# Altium PCB NRF51822 PCB.PcbDoc
Units mil, origin at the board's own origin, x right, y up, seen from the top; angles counter-clockwise.
Board outline 3525 x 2710 mil, 2 copper layers (Top Layer, Bottom Layer); 9 components, 8 nets, 69 pads, 2 vias.
Unrouted connection lines stored in the file: 1.
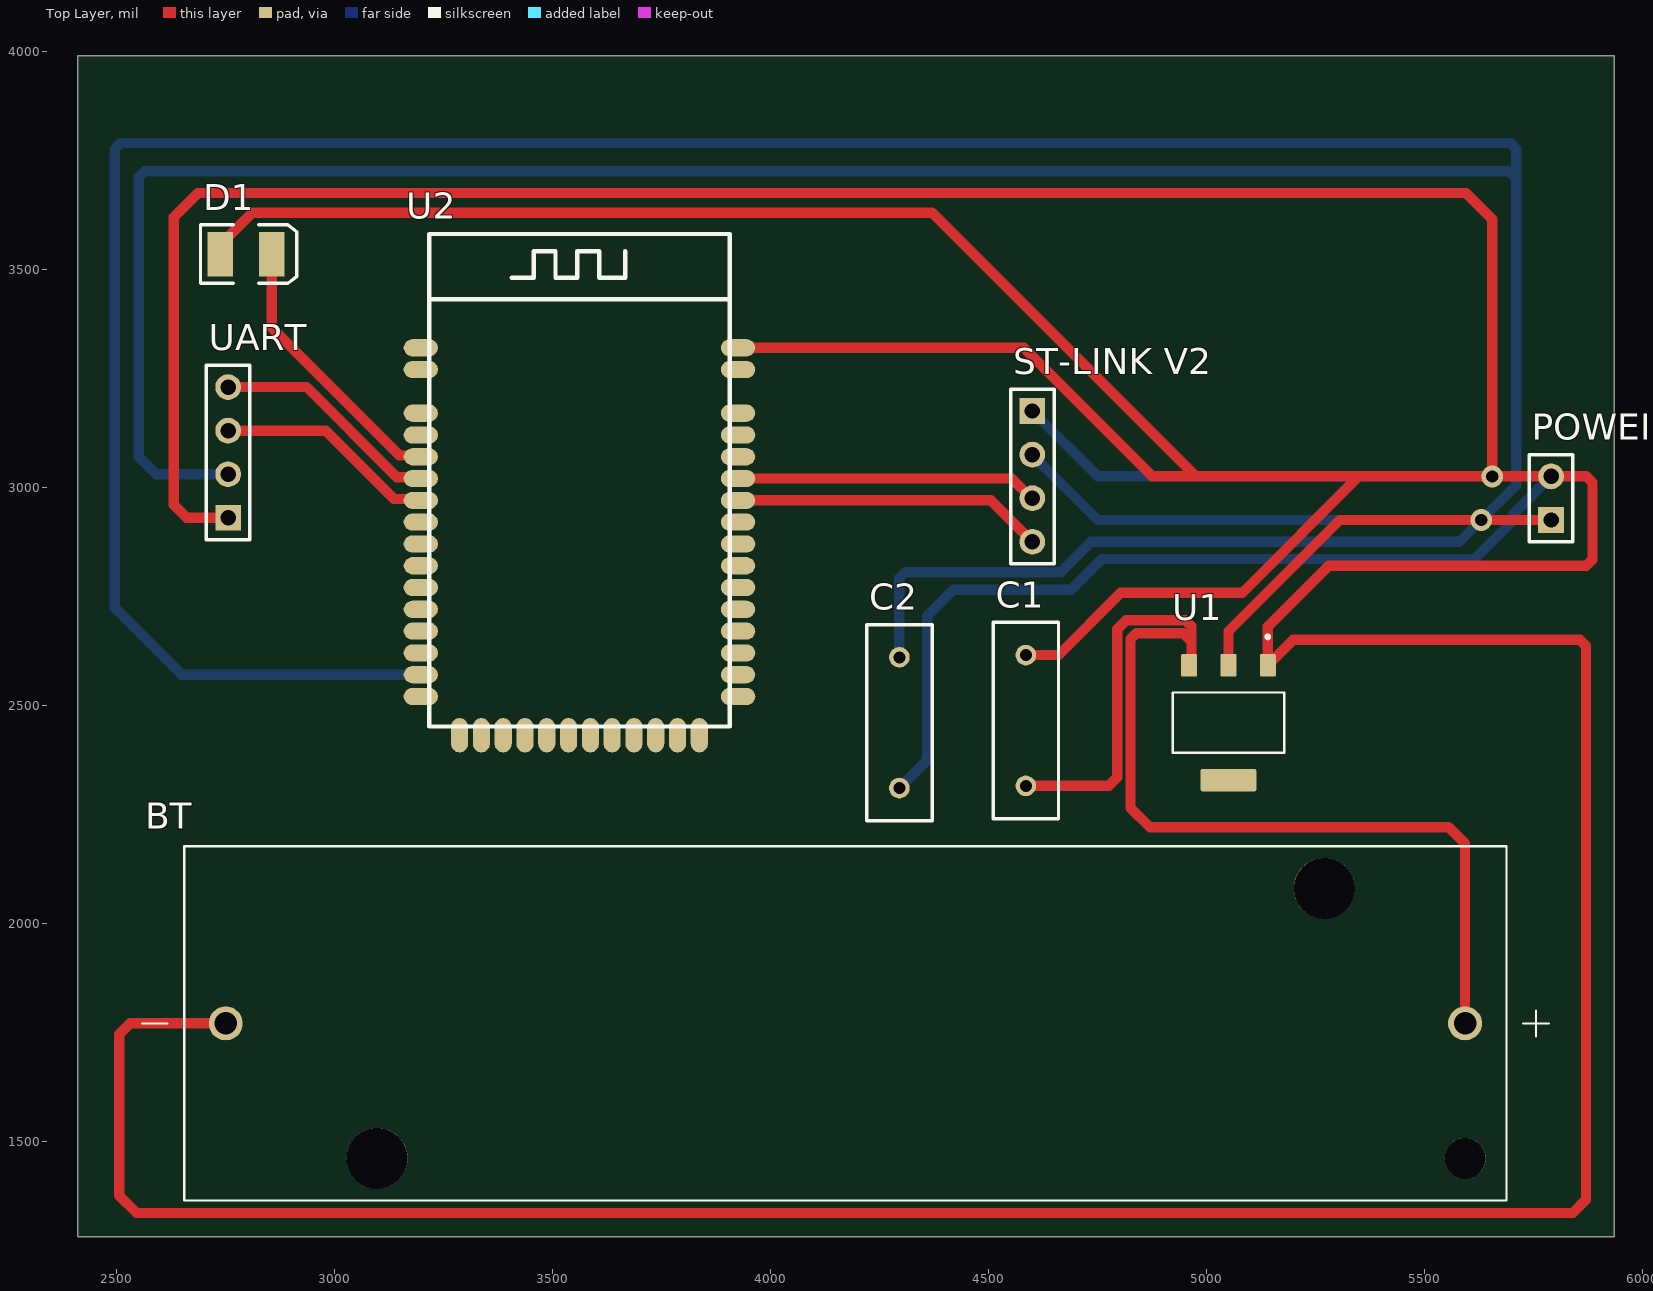
[diagram p0: Top Layer view]
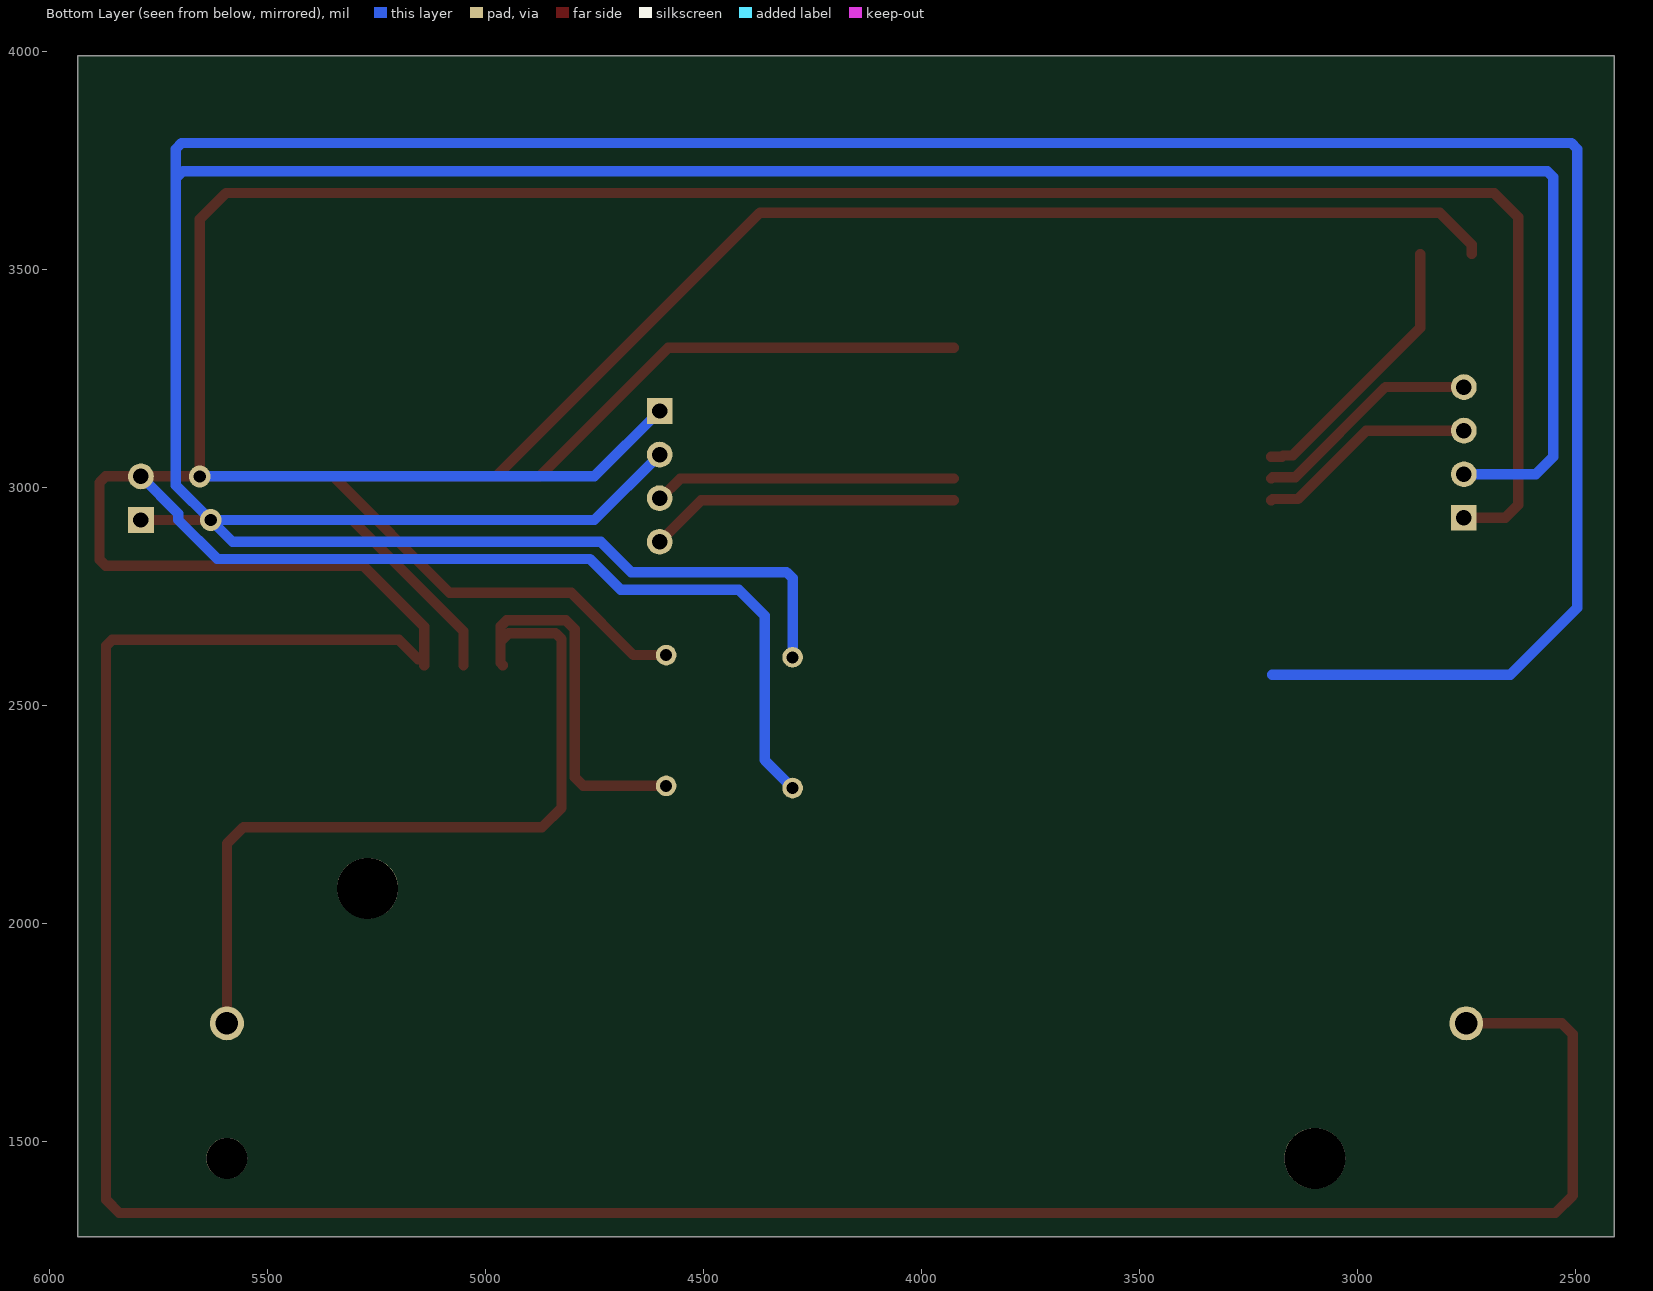
[diagram p1: Bottom Layer view, seen from below]

## Layer stack, top to bottom
Top Solder: solder mask 0.4, Solder Resist, Dk 3.5
Top Layer: signal copper 1.4
Dielectric 1: dielectric 12.6, FR-4, Dk 4.8
Bottom Layer: signal copper 1.4
Bottom Solder: solder mask 0.4, Solder Resist, Dk 3.5

## Board outline
2410,1280 5935,1280 5935,3990 2410,3990

## Design rules (kind name [scope] priority, off if disabled: settings)
Clearance [All] p1: gap=15.78 ignorepadtopadclearanceinfootprint=FALSE
PolygonConnect [All] p1: connectstyle=Relief reliefconductorwidth=10 reliefentries=4 polygonreliefangle="90 Angle" airgapwidth=10
RoutingVias [All] p1: holewidth=28 width=50 viastyle="Through Hole" minholewidth=28 minwidth=50 maxholewidth=28 maxwidth=50
SolderMaskExpansion [All] p1: expansion=4 istentingtop=FALSE
Width [All] p1: maxlimit=23.62 minlimit=10 preferedwidth=23.62
30 further rules are at their usual default settings.

## Components (designator, comment, footprint, x,y, rotation, side; value= is the part's Value field where it differs from the comment)
BT "1043" BAT_1043 4171.18,1770.16 r0 top
C1 "Cap" RAD-0.3 4585,2465 r90 top value=10µF
C2 "Cap" RAD-0.3 4295,2460 r270 top value=10µF
D1 "LED3" 3.5X2.8X1.9 2795.94,3535 r0 top
POWER "Header 2" HDR1X2 5790,2925 r90 top
"ST-LINK V2" "Header 4" HDR1X4 4600,3175 r270 top
U1 "AMS1117-3.3" SOT229P700X180-4N 5050,2460 r270 top
U2 "E73-2G4M04S1D" E73-2G4M04S1D 3906,3581.1 r180 top
UART "Header 4" HDR1X4 2755,2930 r90 top

## Footprints (in the part's own frame and the unit in brackets; to place one, negate y for a bottom-side part, rotate by r counter-clockwise, add the part's x,y. Pads: shape width x height; smd on the part's side, far side on the other; paste and mask are expansions set on the pad)
3.5X2.8X1.9 [mm] "SM LED; 2 C-Bend Leads; Body 3.5 x 2.8 x 1.9 mm, inc leads (LxWxH typ)"
  rect 1.5x2.6 smd: 1(-1.5,0) 2(1.5,0)
  silkscreen extent -2.65,-1.7 2.95,1.7
BAT_1043 [mm]
  round 1.98 hole 1.32: N(-36.11,0) P(36.11,0)
  round 3.55 hole 3.55 unplated: ""(-27.29,-7.87) ""(27.91,7.87)
  round 2.39 hole 2.39 unplated: ""(36.11,-7.87)
  silkscreen extent -41,-10.33 41,10.33, body extent -38.53,-10.33 38.53,10.33, height 14.86
E73-2G4M04S1D [mm]
  oval 2x1 smd: 0(18.009,6.632) 1(18.009,7.902) 2(18.009,10.442) 3(18.009,11.712) 4(18.009,12.982) 5(18.009,14.252) 6(18.009,15.522) 7(18.009,16.792) 8(18.009,18.062) 9(18.009,19.332) 10(18.009,20.602) 11(18.009,21.872) 12(18.009,23.142) 13(18.009,24.412) 14(18.009,25.682) 15(18.009,26.952) 28(-0.483,26.952) 29(-0.483,25.682) 30(-0.483,24.412) 31(-0.483,23.142) 32(-0.483,21.872) 33(-0.483,20.602) 34(-0.483,19.332) 35(-0.483,18.062) 36(-0.483,16.792) 37(-0.483,15.522) 38(-0.483,14.252) 39(-0.483,12.982) 40(-0.483,11.712) 41(-0.483,10.442) 42(-0.483,7.902) 43(-0.483,6.632)
  oval 1x2 smd: 16(15.748,29.21) 17(14.478,29.21) 18(13.208,29.21) 19(11.938,29.21) 20(10.668,29.21) 21(9.398,29.21) 22(8.128,29.21) 23(6.858,29.21) 24(5.588,29.21) 25(4.318,29.21) 26(3.048,29.21) 27(1.778,29.21)
  silkscreen extent 0,0 17.53,28.7
HDR1X2 [mm] "Connector; Header; 2 Position"
  rect 1.5x1.5 hole 0.9: 1(0,0)
  round 1.5 hole 0.9: 2(2.54,0)
  silkscreen extent -1.27,-1.27 3.81,1.27
HDR1X4 [mm] "Connector; Header; 4 Position"
  rect 1.5x1.5 hole 0.9: 1(0,0)
  round 1.5 hole 0.9: 2(2.54,0) 3(5.08,0) 4(7.62,0)
  silkscreen extent -1.27,-1.27 8.89,1.27
RAD-0.3 [mm] "Radial Cap, Thru-Hole; 2 Leads; 0.3 in Pin Spacing"
  round 1.2 hole 0.7: 1(-3.81,0) 2(3.81,0)
  silkscreen extent -5.71,-1.91 5.71,1.91
SOT229P700X180-4N [mm]
  rrect15% 1.31x0.93 smd: 1(-3.345,2.29) 2(-3.345,0) 3(-3.345,-2.29)
  rrect15% 1.31x3.24 smd: 4(3.345,0)
  silkscreen extent -5.1,-3.25 1.75,3.25, body extent -3.25,-3.5 3.25,3.5, height 1.8

## Part data
BT: "THM Holder for 18650 Battery", Package="NON STANDARD-5 Keystone", Check_prices=https://www.snapeda.com/parts/1043/Keystone/view-part/?ref=eda, MF="Keystone Electronics", MP=1043, SnapEDA_Link=https://www.snapeda.com/parts/1043/Keystone/view-part/?ref=snap
C1 C2: "Capacitor", LatestRevisionDate=17-Jul-2002, LatestRevisionNote="Re-released for DXP Platform.", PackageDescription="Radial Cap, Thru-Hole; 2 Leads; 0.3 in Pin Spacing", PackageReference=RAD-0.3, Published=8-Jun-2000, Publisher="Altium Limited"
D1: "Typical BLUE SiC LED", DatasheetVersion=16-Apr-2002, LatestRevisionDate=17-Dec-2003, LatestRevisionNote="PCB Footprint replaced.", PackageDescription="SM LED; 2 C-Bend Leads; Body 3.5 x 2.8 x 1.9 mm, inc leads (LxWxH typ)", PackageReference=3.5X2.8X1.9, PackageVersion=16-Apr-2002, Published=8-Jun-2000, Publisher="Altium Limited"
POWER: "Header, 2-Pin", LatestRevisionDate=17-Jul-2002, LatestRevisionNote="Re-released for DXP Platform.", Publisher="Altium Limited"
"ST-LINK V2" UART: "Header, 4-Pin", LatestRevisionDate=17-Jul-2002, LatestRevisionNote="Re-released for DXP Platform.", Publisher="Altium Limited"
U1: "Sot223/Pkg 1-Amp 3.3-Volt Low Drop Out Voltage Regulatator", Package="SOT-223 Seeed Technology", Check_prices=https://www.snapeda.com/parts/AMS1117-3.3/Advanced+Monolithic+Systems/view-part/?ref=eda, MF="Advanced Monolithic Systems", MP=AMS1117-3.3, SnapEDA_Link=https://www.snapeda.com/parts/AMS1117-3.3/Advanced+Monolithic+Systems/view-part/?ref=snap
U2: "E73-2G4M04S1D is a small Bluetooth module that features ultra low power consumption with dual antenna PCB and IPX antenna of high performance. Based on originally imported IC nRF51822 from NORDIC,the module supports BLE 4.2 protocol."

## Via types
v1: diameter 50, hole 28, Top Layer to Bottom Layer, 2 vias

## Nets (pads, with @x,y where several pads share a name; then routed paths per layer and width w, separated by ;. In a path a pad name is that pad's centre, name@x,y a point inside that pad or via, vN(x,y) a via of type N, cw(c..) or ccw(c..) an arc to the next point about the centre after c; other vN are vias at no path point)
3.3V: "ST-LINK V2.2" C2.1 POWER.1 U1.2 U2.14 UART.2 | length 13546.3
  Top Layer w23.62: U1.2 5050,2670 5305,2925 v1(5630,2925) POWER.1
  Bottom Layer w23.62: UART.2 2590,3030 2550,3070 2550,3711.16 2563.84,3725 5693.76,3725 5707.6,3711.16 ; 3195,2570 2648.84,2570 2495,2723.84 2495,3776.16 2508.84,3790 5696.16,3790 5710,3776.16 5710,3005 v1(5630,2925) ; C2.1 4295,2791.16 4308.84,2805 4665,2805 4735,2875 5580,2875 v1(5630,2925) ; 4600,3075 4750,2925 v1(5630,2925)
GND: "ST-LINK V2.1" BT.N C1.2 C2.2 D1.1 POWER.2 U1.1 U2.43 UART.1 | length 20254.6
  Top Layer w23.62: D1.1 2736.89,3556.65 2810.24,3630 4370,3630 4975,3025 ; BT.N 2530.16,1770.16 2505,1745 2505,1375 2545,1335 5840,1335 5870,1365 5870,2636.16 5856.16,2650 5198.46,2650 5154.13,2605.67 5146.65,2605.67 U1.1@5140.16,2599.17 ; UART.1 2660,2930 2630,2960 2630,3620 2685,3675 5595,3675 5655,3615 v1(5655,3025) ; U2.43 4580,3320 4875,3025 4975,3025 ; C1.2 4660,2615 4802.86,2757.86 5082.14,2757.86 5349.27,3025 ; U1.1 U1.1@5140.16,2599.17 ; 4975,3025 5349.27,3025 ; U1.1@5140.16,2599.17 5140.16,2680.16 5280,2820 5871.16,2820 5885,2833.84 5885,3011.16 5871.16,3025 POWER.2 v1(5655,3025) ; 5349.27,3025 v1(5655,3025)
  Bottom Layer w23.62: C2.2 4359.18,2374.18 4359.18,2705.34 4418.84,2765 4689.41,2765 4760,2835.59 5614.97,2835.59 5704.38,2925 5704.38,2939.38 POWER.2 ; 4600,3175 4750,3025 v1(5655,3025)
"OUT 1": D1.2 U2.4 | length 633.8
  Top Layer w23.62: D1.2 2855,3365.73 3147.72,3073.01 3170.04,3073.01 3173.05,3070 U2.4
RX: U2.6 UART.3 | length 508.3
  Top Layer w23.62: UART.3 2979.27,3130 3136.26,2973.01 3193.99,2973.01 U2.6
SWDCLK: "ST-LINK V2.4" U2.37 | length 714.4
  Top Layer w23.62: U2.37 4505,2970 4600,2875
SWDIO: "ST-LINK V2.3" U2.38 | length 693.6
  Top Layer w23.62: U2.38 4553.13,3020 4598.13,2975 4600,2975
TX: U2.5 UART.4 | length 529
  Top Layer w23.62: UART.4 2935,3230 3141.99,3023.01 3193.99,3023.01 U2.5
VIN: BT.P C1.1 U1.3 | length 2580.1
  Top Layer w23.62: C1.1 4775,2315 4795,2335 4795,2674.27 4815.73,2695 4951.16,2695 4965,2681.16 4965,2651.16 4965,2596.85 U1.3 ; 4959.84,2651.16 4946.01,2665 4838.84,2665 4825,2651.16 4825,2265 4870,2220 5555,2220 5592.83,2182.17 BT.P
pads on no net: BT. U1.4 U2.0 U2.1 U2.2 U2.3 U2.7 U2.8 U2.9 U2.10 U2.11 U2.12 U2.13 U2.15 U2.16 U2.17 U2.18 U2.19 U2.20 U2.21 U2.22 U2.23 U2.24 U2.25 U2.26 U2.27 U2.28 U2.29 U2.30 U2.31 U2.32 U2.33 U2.34 U2.35 U2.36 U2.39 U2.40 U2.41 U2.42